# EAGLE board LQFP32-breakout-two (EAGLE 7.5.0)
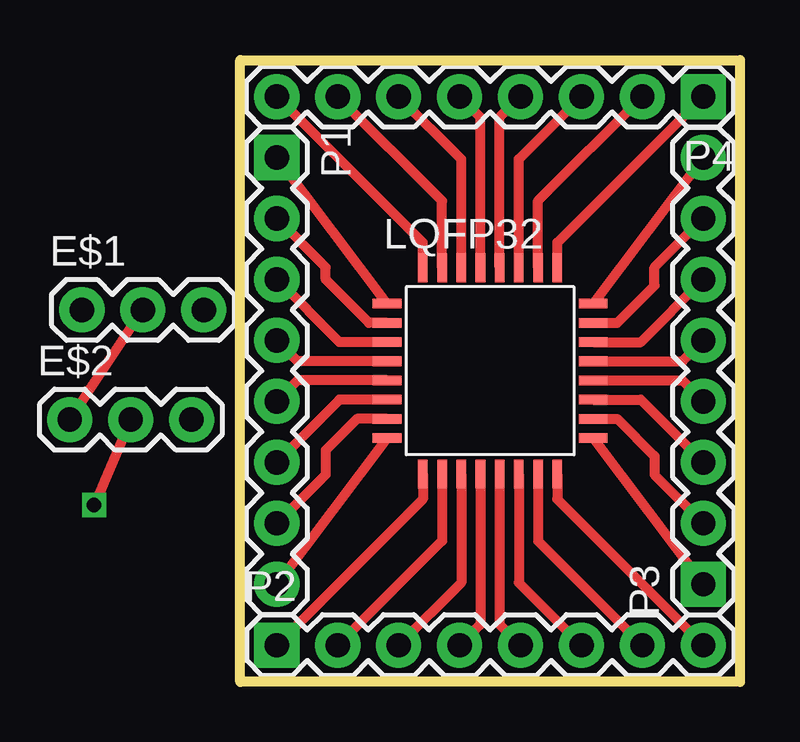
[diagram p0: board, top side]
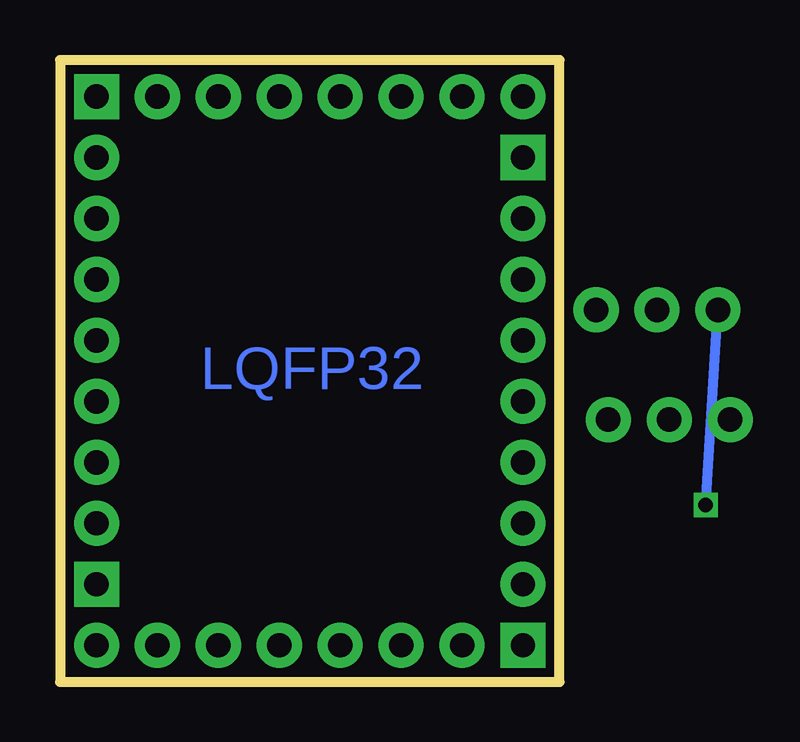
[diagram p1: board, bottom side, seen from below]

Size 20.83 x 25.91 mm. Coordinates in mm from the lower left corner, seen from the top.
Outline: 0,25.91 20.83,25.91 20.83,0 0,0 0,25.91
Copper layers (1*16): Top 0.035mm / dielectric 1.5mm / Bottom 0.035mm
Design rules "default": minimum track width 10mil, minimum drill 24mil, track to track 8mil, track to pad 8mil, pad to pad 8mil, via to via 8mil, smd to smd 8mil, copper to edge 40mil, drill to drill 8mil, minimum pad ring 10mil, minimum via ring 8mil, stop-mask expansion 4mil, vias tented up to drill 0mil, thermal gap 10mil

## Footprints (pad centres in the part's own frame; a part is rotated, then mirrored left to right if it is on the bottom)
1X03 = drill 1.016 pad 1.88: 1 0,0; 2 2.54,0; 3 5.08,0
LQFP32-7X7 = smd 1.2 x 0.4: 1 -4.3,2.8; 2 -4.3,2; 3 -4.3,1.2; 4 -4.3,0.4; 5 -4.3,-0.4; 6 -4.3,-1.2; 7 -4.3,-2; 8 -4.3,-2.8; 17 4.3,-2.8; 18 4.3,-2; 19 4.3,-1.2; 20 4.3,-0.4; 21 4.3,0.4; 22 4.3,1.2; 23 4.3,2; 24 4.3,2.8 | smd 0.4 x 1.2: 9 -2.8,-4.3; 10 -2,-4.3; 11 -1.2,-4.3; 12 -0.4,-4.3; 13 0.4,-4.3; 14 1.2,-4.3; 15 2,-4.3; 16 2.8,-4.3; 25 2.8,4.3; 26 2,4.3; 27 1.2,4.3; 28 0.4,4.3; 29 -0.4,4.3; 30 -1.2,4.3; 31 -2,4.3; 32 -2.8,4.3
1X08 = drill 1.016 pad 1.88 square: 1 0,0 | drill 1.016 pad 1.88: 2 2.54,0; 3 5.08,0; 4 7.62,0; 5 10.16,0; 6 12.7,0; 7 15.24,0; 8 17.78,0

## Placement (x,y rotation side)
E$1  [1X03]  -6.6,15.49 0 top
E$2  [1X03]  -7.11,10.92 0 top
LQFP32  [LQFP32-7X7]  10.41,12.95 0 top
P1  [1X08]  1.52,21.84 270 top
P2  [1X08]  1.52,1.52 0 top
P3  [1X08]  19.3,4.06 90 top
P4  [1X08]  19.3,24.38 180 top

## Library data of the parts
E$1 E$2 P1-P4 = SparkFun-Connectors
LQFP32 = st-microelectronics

## Nets
PA4: LQFP32.10 P2.2
PA5: LQFP32.11 P2.3
PA6: LQFP32.12 P2.4
PA7: LQFP32.13 P2.5
PB0: LQFP32.14 P2.6
PB1: LQFP32.15 P2.7
S$2: LQFP32.9 P2.1
S$3: LQFP32.32 P4.8
S$4: LQFP32.31 P4.7
S$5: LQFP32.30 P4.6
S$6: LQFP32.29 P4.5
S$7: LQFP32.28 P4.4
S$8: LQFP32.27 P4.3
S$9: LQFP32.26 P4.2
S$11: LQFP32.16 P2.8
S$12: LQFP32.25 P4.1
S$15: LQFP32.24 P3.8
S$16: LQFP32.23 P3.7
S$18: LQFP32.22 P3.6
S$19: LQFP32.21 P3.5
S$20: LQFP32.20 P3.4
S$21: LQFP32.19 P3.3
S$22: LQFP32.18 P3.2
S$23: LQFP32.17 P3.1
S$24: LQFP32.8 P1.8
S$26: LQFP32.7 P1.7
S$27: LQFP32.6 P1.6
S$28: LQFP32.5 P1.5
S$29: LQFP32.4 P1.4
S$30: LQFP32.3 P1.3
S$31: LQFP32.2 P1.2
S$32: LQFP32.1 P1.1
S$33: E$1.2 E$2.1
S$34: E$1.1 E$2.2

## Tracks (layer width: path | path; a pad name or v marks a point on that pad's centre or on a via)
PA4
  Top 0.406: LQFP32.10 8.41,5.87 P2.2
PA5
  Top 0.406: LQFP32.11 9.21,4.13 P2.3
PA6
  Top 0.406: LQFP32.12 10.01,2.39 P2.4
PA7
  Top 0.406: LQFP32.13 10.81,2.39 P2.5
PB0
  Top 0.406: LQFP32.14 11.61,4.13 P2.6
PB1
  Top 0.406: LQFP32.15 12.41,5.87 P2.7
S$2
  Top 0.406: LQFP32.9 7.61,7.61 P2.1
S$3
  Top 0.406: LQFP32.32 7.61,18.29 P4.8
S$4
  Top 0.406: LQFP32.31 8.41,20.03 P4.7
S$5
  Top 0.406: LQFP32.30 9.21,21.77 P4.6
S$6
  Top 0.406: LQFP32.29 10.01,23.51 P4.5
S$7
  Top 0.406: LQFP32.28 10.81,23.51 P4.4
S$8
  Top 0.406: LQFP32.27 11.61,21.77 P4.3
S$9
  Top 0.406: LQFP32.26 12.41,20.03 P4.2
S$11
  Top 0.406: LQFP32.16 13.21,7.61 P2.8
S$12
  Top 0.406: LQFP32.25 13.21,18.29 P4.1
S$15
  Top 0.406: LQFP32.24 P3.8
S$16
  Top 0.406: LQFP32.23 15.72,14.95 17.27,16.51 17.27,17.27 P3.7
S$18
  Top 0.406: LQFP32.22 16.69,14.15 P3.6
S$19
  Top 0.406: LQFP32.21 18.43,13.35 P3.5
S$20
  Top 0.406: LQFP32.20 18.43,12.55 P3.4
S$21
  Top 0.406: LQFP32.19 16.69,11.75 P3.3
S$22
  Top 0.406: LQFP32.18 15.72,10.95 17.27,9.4 17.27,8.64 P3.2
S$23
  Top 0.406: LQFP32.17 P3.1
S$24
  Top 0.406: LQFP32.8 P1.8
S$26
  Top 0.406: LQFP32.7 4.86,10.95 3.56,9.65 3.56,8.64 P1.7
S$27
  Top 0.406: LQFP32.6 4.13,11.75 P1.6
S$28
  Top 0.406: LQFP32.5 2.39,12.55 P1.5
S$29
  Top 0.406: LQFP32.4 2.39,13.35 P1.4
S$30
  Top 0.406: LQFP32.3 4.13,14.15 P1.3
S$31
  Top 0.406: LQFP32.2 5.37,14.95 3.56,16.76 3.56,17.27 P1.2
S$32
  Top 0.406: LQFP32.1 P1.1
S$33
  Top 0.406: E$2.1 E$1.2
S$34  (via drill 0.6)
  Top 0.406: E$2.2 v-6.1,7.37
  Bottom 0.406: v-6.1,7.37 E$1.1

## Text on the board
Bottom: LQFP32